# Altium PCB PCB1.PcbDoc
Units mm, origin at the board's own origin, x right, y up, seen from the top; angles counter-clockwise.
Board outline 152.4 x 101.6 mm, 2 copper layers (Top Layer, Bottom Layer); 18 components, 4 nets, 44 pads, 0 vias.
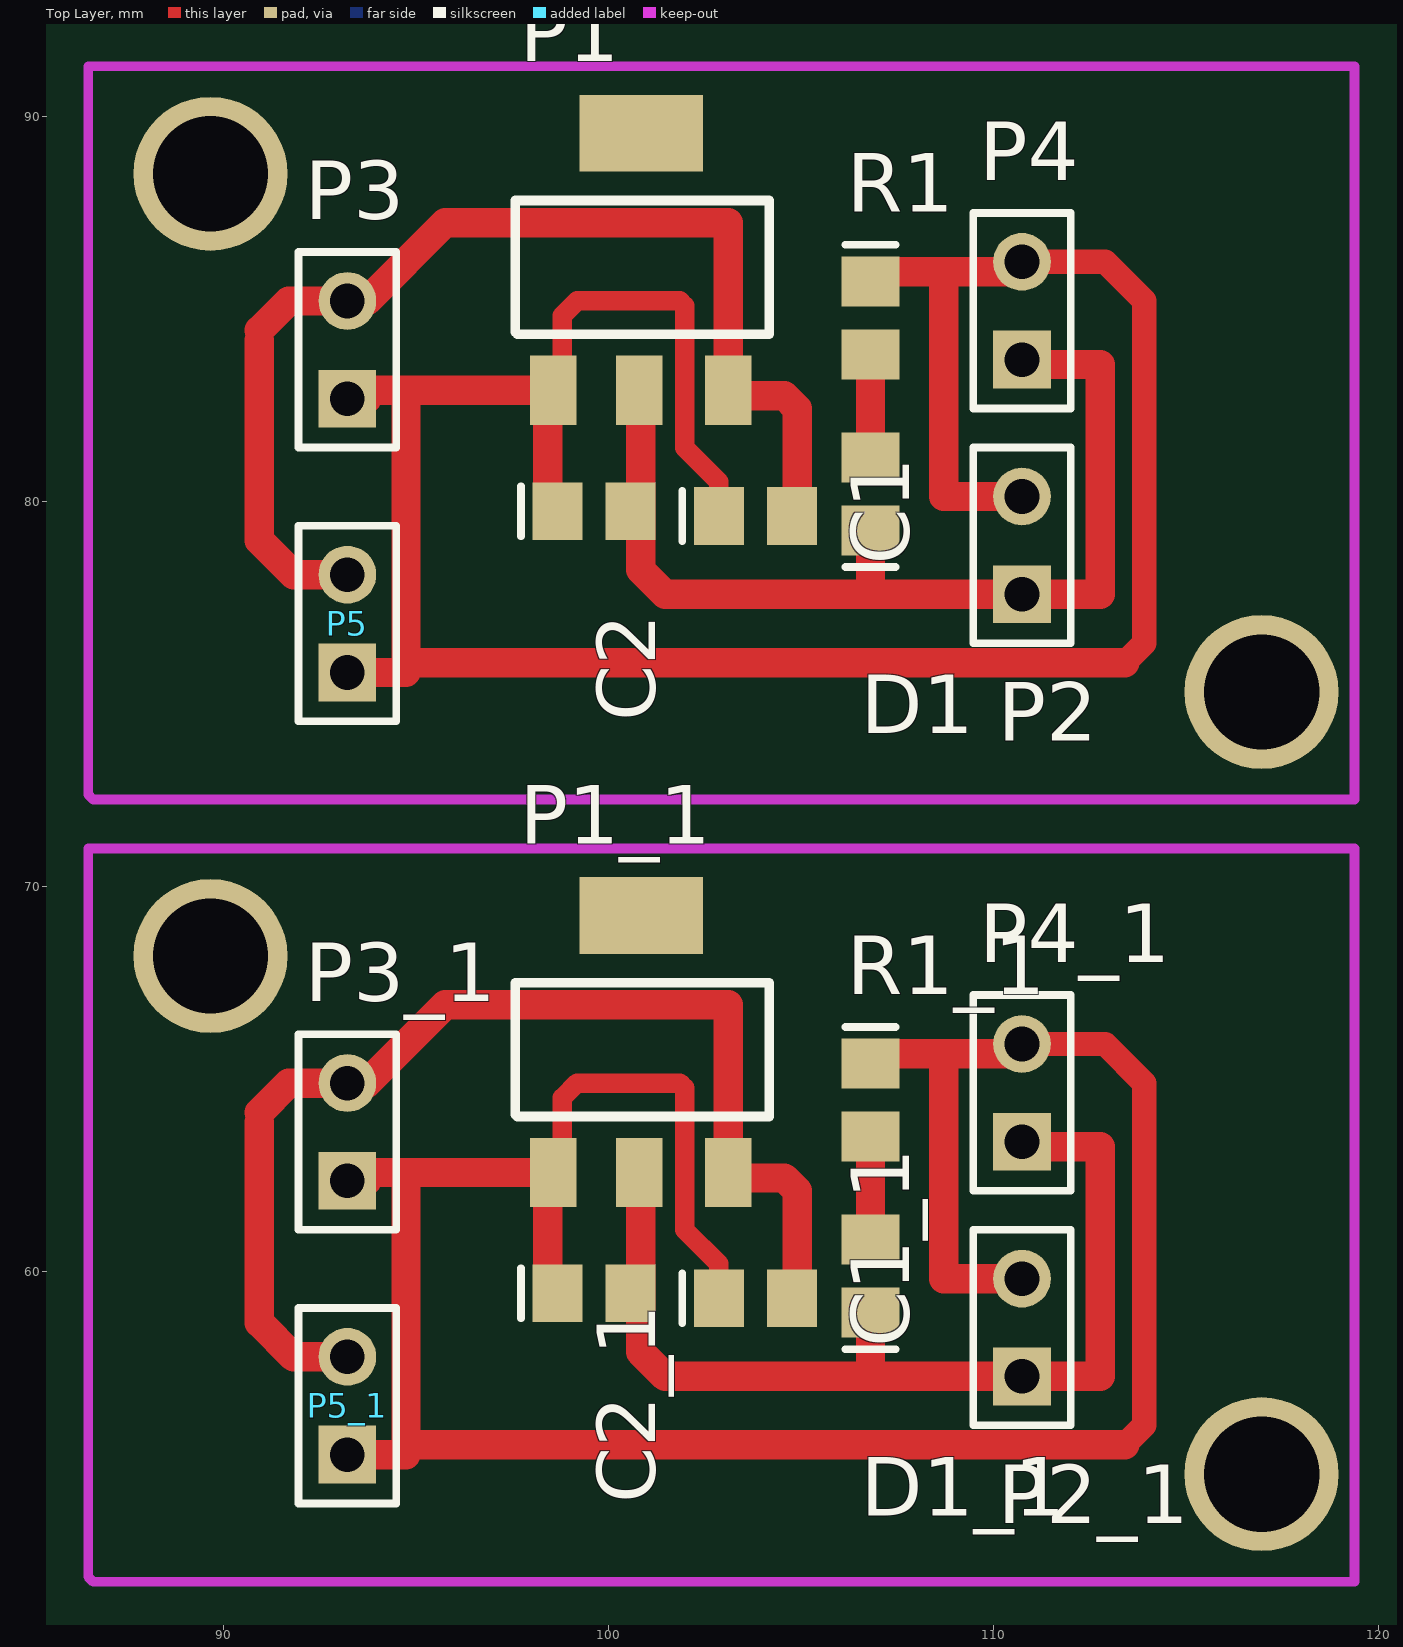
[diagram p0: Top Layer view]
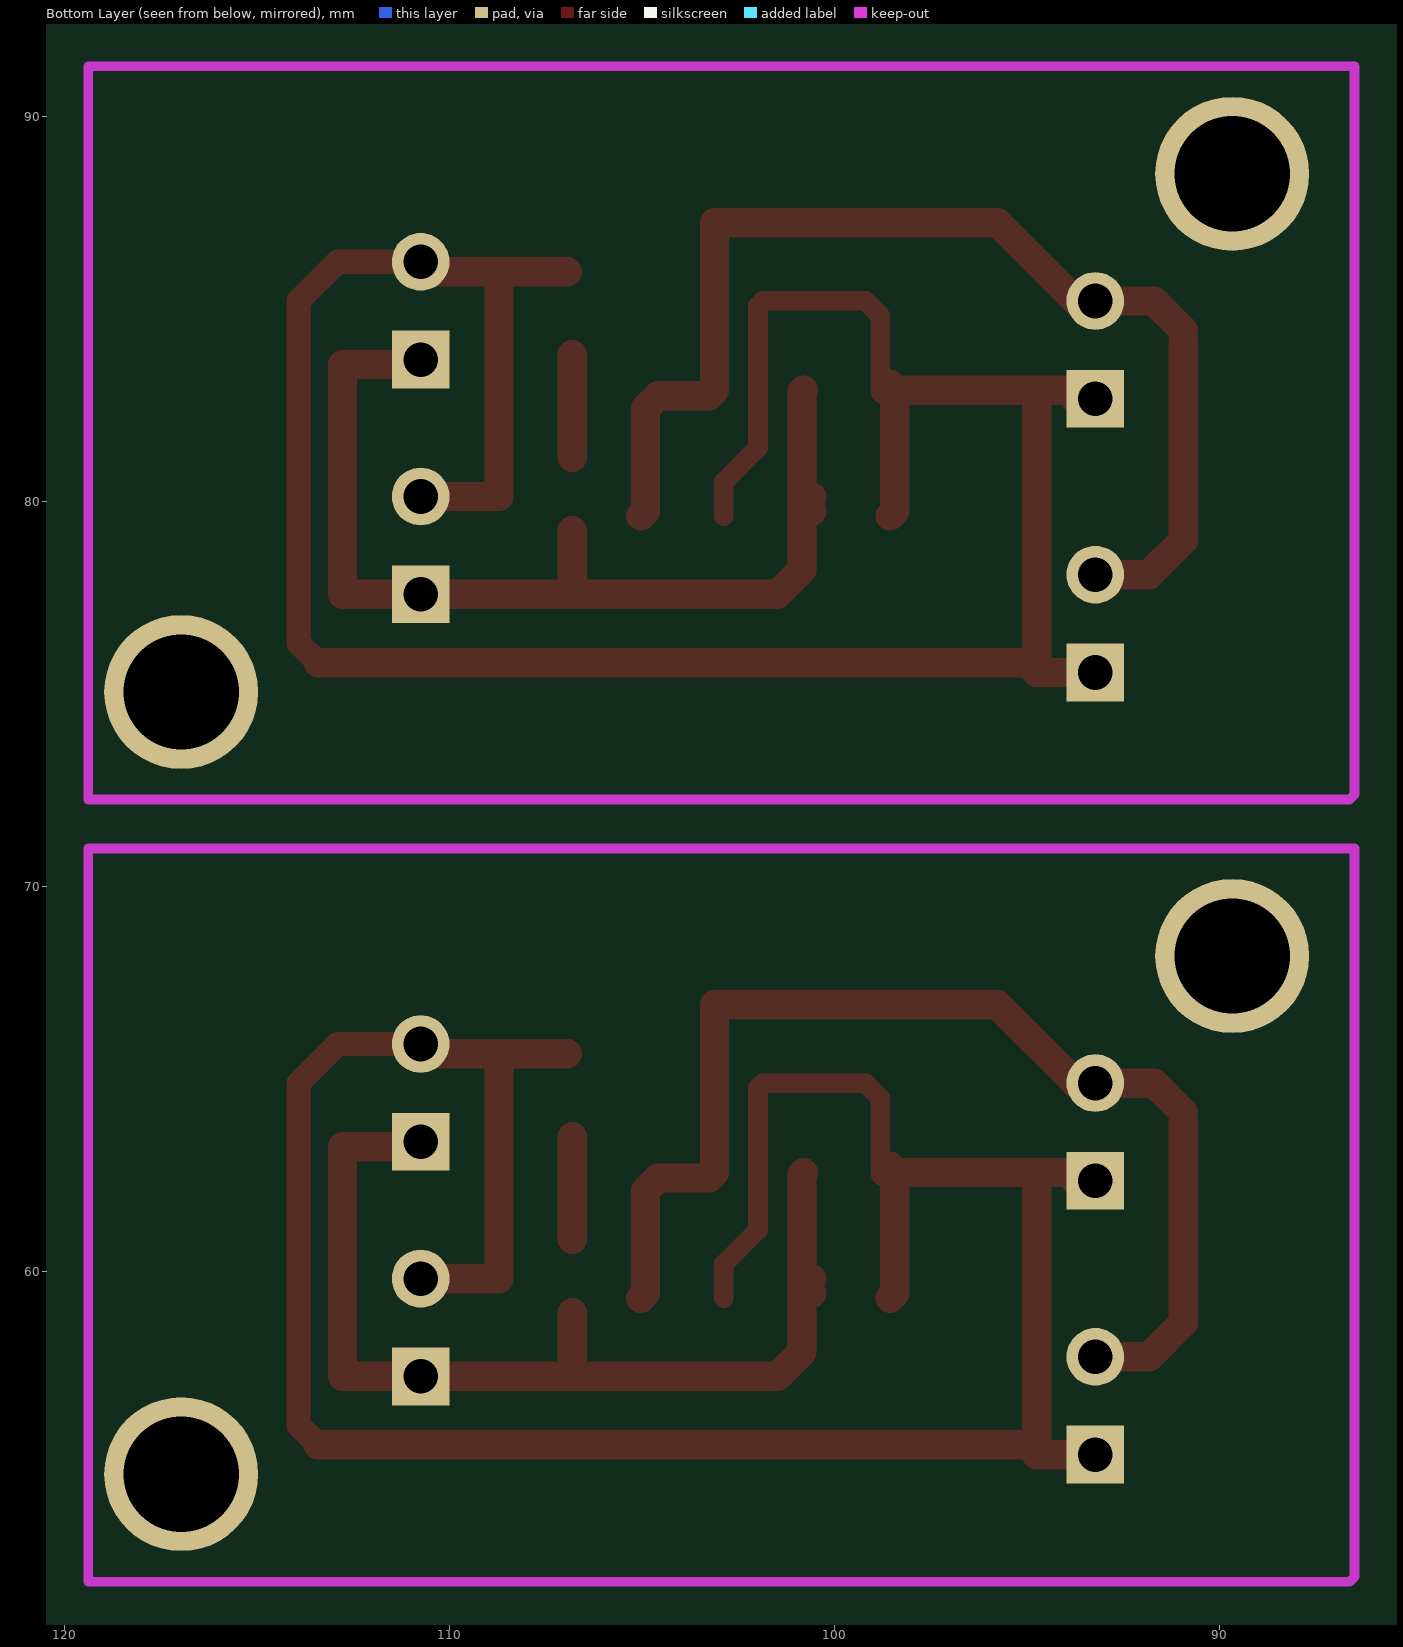
[diagram p1: Bottom Layer view, seen from below]

## Layer stack, top to bottom
Top Layer: signal copper 0.0356
Dielectric: dielectric 0.32, FR-4, Dk 4.8
Bottom Layer: signal copper 0.0356

## Board outline
25.4,25.4 177.8,25.4 177.8,127 25.4,127

## Design rules (kind name [scope] priority, off if disabled: settings)
Clearance [All] p1: gap=0.254
ComponentClearance [All] p1: gap=0.254 collisioncheckmode=3 verticalgap=0.254
PolygonConnect [All] p1: connectstyle=Relief reliefconductorwidth=0.254 reliefentries=4 polygonreliefangle="90 Angle"
RoutingVias [All] p1: holewidth=0.711 width=1.27 viastyle="Through Hole" minholewidth=0.711 minwidth=1.27 maxholewidth=0.711 maxwidth=1.27
SolderMaskExpansion [All] p1: expansion=0.102
TestPointUsage [All] p1: valid=0 allowmultiple=FALSE
Testpoint [All] p1: side=15 testpointundercomponent=TRUE minsize=1.016 maxsize=2.54 preferedsize=1.524 minholesize=0 maxholesize=1.016 preferedholesize=0.813 testpointgrid=0.025 style=1023 order=0-112345678
Width [All] p1: maxlimit=1.27 minlimit=0.254 preferedwidth=0.762
18 further rules are at their usual default settings.

## Classes and differential pairs
component class Sheet1: C1 C2 D1 P1 P2 P3 P4 P5 R1

## Components (designator, comment, footprint, x,y, rotation, side; value= is the part's Value field where it differs from the comment)
C1 "Cap" C0805 103.82,79.629 r0 top
C1_1 "Cap" C0805 103.82,59.309 r0 top (schematic designator C1)
C2 "Cap" C0805 99.629,79.756 r0 top
C2_1 "Cap" C0805 99.629,59.436 r0 top (schematic designator C2)
D1 "LED0" C0805 106.807,80.203 r90 top
D1_1 "LED0" C0805 106.807,59.883 r90 top (schematic designator D1)
P1 "Header 3" AMS1117-223 100.838,86.233 r0 top
P1_1 "Header 3" AMS1117-223 100.838,65.913 r0 top (schematic designator P1)
P2 "Header 2" HDR1X2 110.744,77.597 r90 top
P2_1 "Header 2" HDR1X2 110.744,57.277 r90 top (schematic designator P2)
P3 "Header 2" HDR1X2 93.218,82.677 r90 top
P3_1 "Header 2" HDR1X2 93.218,62.357 r90 top (schematic designator P3)
P4 "Header 2" HDR1X2 110.744,83.693 r90 top
P4_1 "Header 2" HDR1X2 110.744,63.373 r90 top (schematic designator P4)
P5 "Header 2" HDR1X2 93.218,75.565 r90 top
P5_1 "Header 2" HDR1X2 93.218,55.245 r90 top (schematic designator P5)
R1 "Res2" C0805 106.807,84.775 r270 top
R1_1 "Res2" C0805 106.807,64.455 r270 top (schematic designator R1)

## Footprints (in the part's own frame and the unit in brackets; to place one, negate y for a bottom-side part, rotate by r counter-clockwise, add the part's x,y. Pads: shape width x height; smd on the part's side, far side on the other; paste and mask are expansions set on the pad)
AMS1117-223 [mm]
  rect 1.2x1.8 smd: 1(-2.273,-3.34) 2(-0.038,-3.34) 3(2.273,-3.34)
  rect 3.2x2 smd: 1(0.013,3.34)
  silkscreen extent -3.26,-1.88 3.34,1.59
C0805 [mm] "Chip Capacitor; Body 2.0 x 1.2 mm (LxW typ)"
  rect 1.3x1.5 smd: 1(-0.95,0) 2(0.95,0)
  silkscreen extent -1.9,-0.65 -1.9,0.65
HDR1X2 [mm] "Connector; Header; 2 Position"
  rect 1.5x1.5 hole 0.9: 1(0,0)
  round 1.5 hole 0.9: 2(2.54,0)
  silkscreen extent -1.27,-1.27 3.81,1.27

## Part data
C1 C1_1 C2 C2_1: "Capacitor"
D1 D1_1: "Typical INFRARED GaAs LED"
P1 P1_1: "Header, 3-Pin"
P2 P2_1 P3 P3_1 P4 P4_1 P5 P5_1: "Header, 2-Pin"
R1 R1_1: "Resistor"

## Free pads (board coordinates)
  round 4 hole 3: 0(89.662,68.199) 0(89.662,88.519) 1(116.967,54.737) 1(116.967,75.057)

## Nets (pads, with @x,y where several pads share a name; then routed paths per layer and width w, separated by ;. In a path a pad name is that pad's centre, name@x,y a point inside that pad or via, vN(x,y) a via of type N, cw(c..) or ccw(c..) an arc to the next point about the centre after c; other vN are vias at no path point)
GND: C1.1 C2.1 P1.1@98.565,82.893 P2.2 P3.1 P4.2 P5.1 R1.1 | length 71.8
  Top Layer w0.508: P1.1@98.679,82.893 98.806,83.02 98.806,84.836 99.187,85.217 101.854,85.217 101.981,85.09 101.981,81.407 102.87,80.518 C1.1
  Top Layer w0.635: P4.2 112.903,86.233 113.919,85.217 113.919,76.327 113.411,75.819
  Top Layer w0.762: P5.1 94.742,75.565 94.742,75.819 ; P3.1@93.726,82.677 93.726,82.893 94.742,82.893 ; P1.1@98.425,82.55 98.425,79.756 C2.1@98.552,79.629 ; P1.1@98.552,83.058 98.565,83.058 98.679,83.058 P1.1@98.679,82.893 ; P1.1@98.565,82.893 94.742,82.893 ; R1.1@106.934,85.979 108.712,85.979 ; P4.2@110.617,85.979 108.712,85.979 ; P2.2 108.712,80.137 108.712,85.979 ; 113.411,75.819 94.742,75.819 ; 94.742,75.819 94.742,82.893
NetD1_2: D1.2 R1.2 | length 2.7
  Top Layer w0.762: D1.2 R1.2
OUT: C2.2 D1.1 P1.2 P2.1 P4.1 | length 27.4
  Top Layer w0.762: C2.2 C2.2@100.711,79.756 ; C2.2@100.584,80.137 100.711,80.01 C2.2@100.711,79.756 ; P1.2 100.838,82.855 C2.2@100.838,79.756 ; D1.1 106.807,77.597 ; P4.1 110.744,83.566 112.776,83.566 112.776,77.597 P2.1 106.807,77.597 ; C2.2@100.711,79.756 C2.2@100.838,79.756 ; C2.2@100.838,79.756 100.838,78.232 101.473,77.597 106.807,77.597
VIN: C1.2 P1.3 P3.2 P5.2 | length 30
  Top Layer w0.762: 90.932,84.201 90.932,78.994 91.821,78.105 P5.2 ; 90.932,84.455 91.694,85.217 P3.2@92.964,85.217 ; P3.2@92.964,84.963 P3.2 ; P3.2@93.726,85.217 95.758,87.249 103.111,87.249 P1.3 103.251,82.753 104.572,82.753 104.902,82.423 104.902,79.756 C1.2@105.029,79.629
pads on no net: C1_1.1 C1_1.2 C2_1.1 C2_1.2 D1_1.1 D1_1.2 P1.1@100.851,89.573 P1_1.1 P1_1.2 P1_1.3 P2_1.1 P2_1.2 P3_1.1 P3_1.2 P4_1.1 P4_1.2 P5_1.1 P5_1.2 R1_1.1 R1_1.2
copper on no net: | length 131.8
  Top Layer w0.508: 98.679,62.573 98.806,62.7 98.806,64.516 99.187,64.897 101.854,64.897 101.981,64.77 101.981,61.087 102.87,60.198 102.87,59.309
  Top Layer w0.635: 110.744,65.913 112.903,65.913 113.919,64.897 113.919,56.007 113.411,55.499
  Top Layer w0.762: 90.932,63.881 90.932,58.674 91.821,57.785 93.218,57.785 ; 90.932,64.135 91.694,64.897 92.964,64.897 ; 92.964,64.643 93.218,64.897 ; 93.218,55.245 94.742,55.245 94.742,55.499 ; 93.726,62.357 93.726,62.573 94.742,62.573 ; 93.726,64.897 95.758,66.929 103.111,66.929 103.111,62.573 103.251,62.433 104.572,62.433 104.902,62.103 104.902,59.436 105.029,59.309 ; 98.425,62.23 98.425,59.436 98.552,59.309 ; 98.552,62.738 98.565,62.738 98.679,62.738 98.679,62.573 ; 98.565,62.573 94.742,62.573 ; 100.579,59.436 100.711,59.436 ; 100.584,59.817 100.711,59.69 100.711,59.436 ; 100.8,62.573 100.838,62.535 100.838,59.436 ; 106.807,58.933 106.807,57.277 ; 106.807,60.833 106.807,63.505 ; 106.934,65.659 108.712,65.659 ; 110.617,65.659 108.712,65.659 ; 110.744,59.817 108.712,59.817 108.712,65.659 ; 110.744,63.373 110.744,63.246 112.776,63.246 112.776,57.277 110.744,57.277 106.807,57.277 ; 113.411,55.499 94.742,55.499 ; 94.742,55.499 94.742,62.573 ; 100.711,59.436 100.838,59.436 ; 100.838,59.436 100.838,57.912 101.473,57.277 106.807,57.277

## Keep-outs
Keep-Out Layer:
  lines w0.255: 86.487,52.07 86.487,70.993 87.63,70.993 119.38,70.993 119.38,51.943 86.614,51.943 86.487,52.07 ; 86.487,72.39 86.614,72.263 119.38,72.263 119.38,91.313 87.63,91.313 86.487,91.313 86.487,72.39